# Altium PCB PA_CONTROL_BOARD.PcbDoc
Units mm, origin at the board's own origin, x right, y up, seen from the top; angles counter-clockwise.
Board outline 160 x 110 mm, 4 copper layers (Top Layer, L2(GND), L3(GND), Bottom Layer), stack 1.57 mm thick; 72 components, 82 nets, 322 pads, 4 vias.
Unrouted connection lines stored in the file: 173.
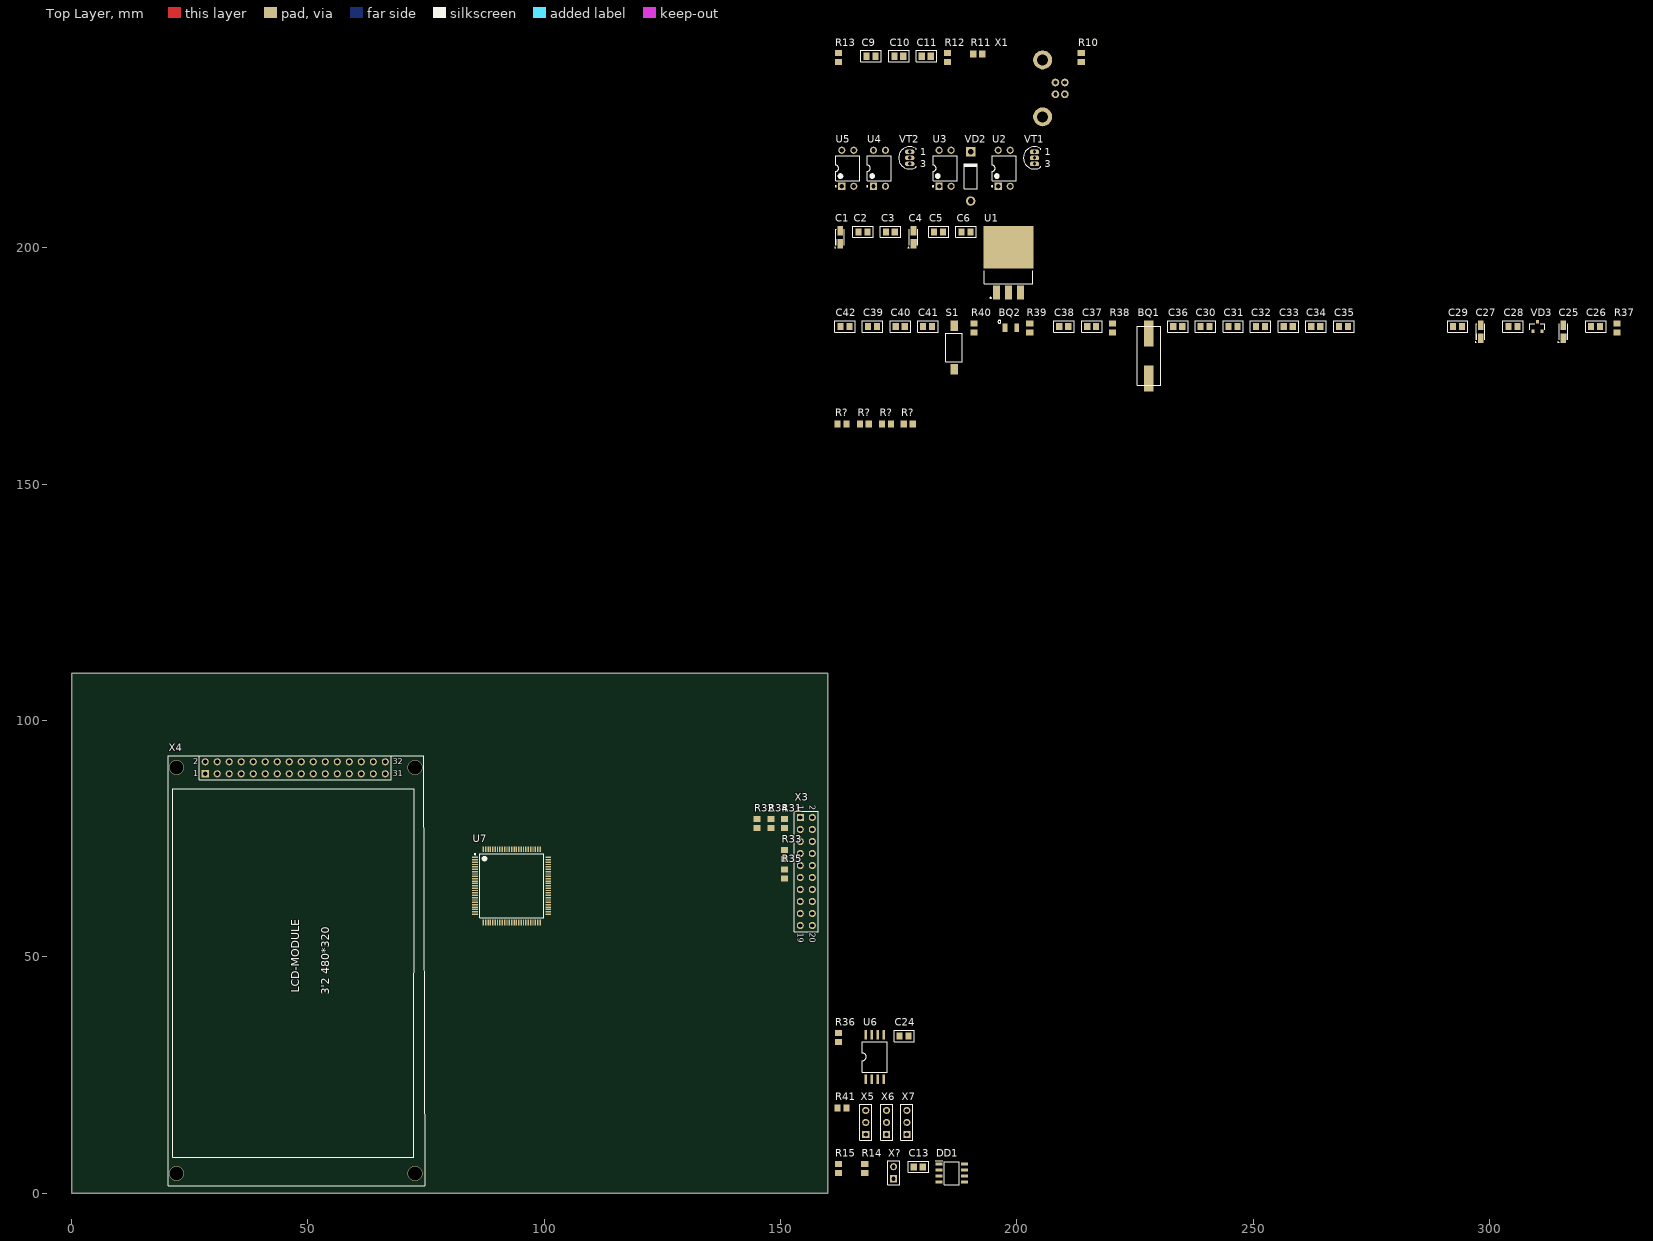
[diagram p0: Top Layer view]
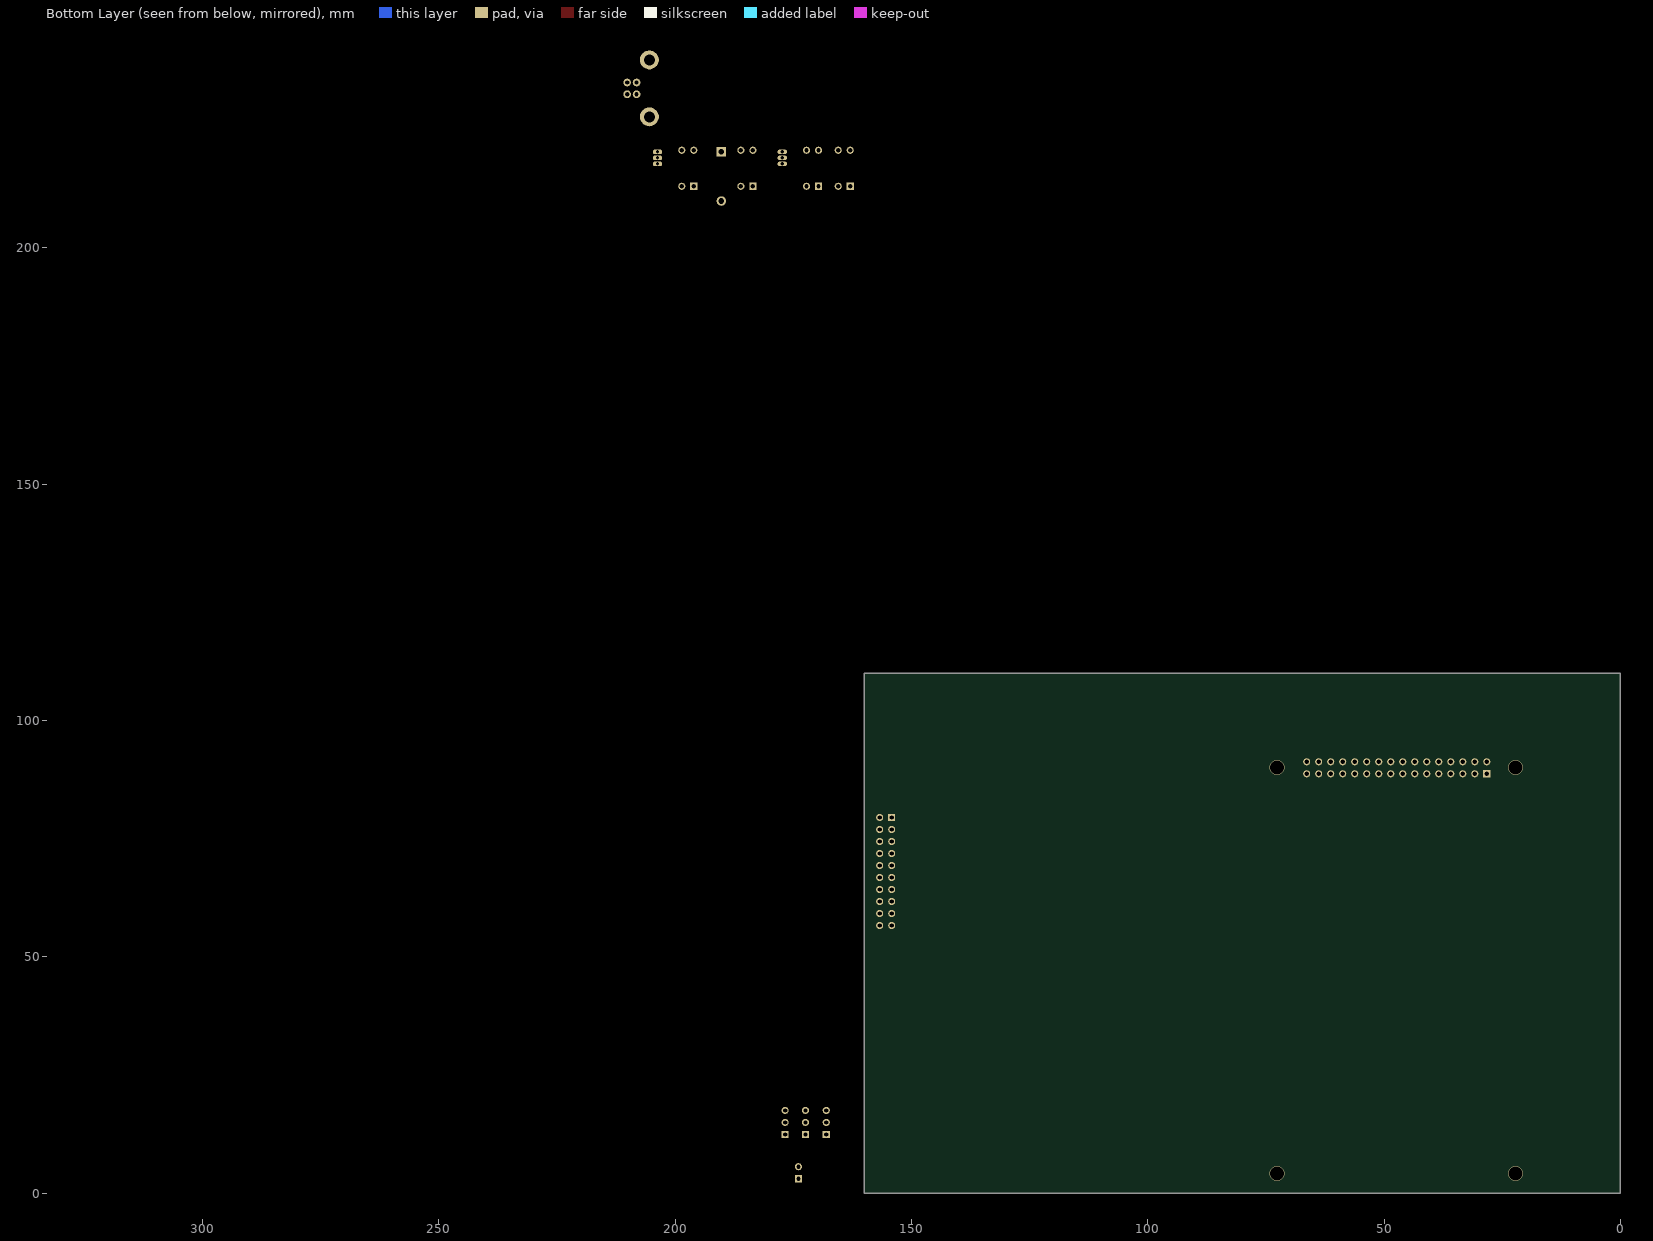
[diagram p1: Bottom Layer view, seen from below]

## Layer stack, top to bottom
Top Solder: solder mask 0.0254, Solder Resist, Dk 3.5
Top Layer: signal copper 0.035
Dielectric 2: prepreg 0.2, PP-017, Dk 4.6
L2(GND): signal copper 0.0175
Dielectric 1: core 1.065, Core-039, Dk 4.6
L3(GND): signal copper 0.0175
Dielectric 3: prepreg 0.2, PP-017, Dk 4.6
Bottom Layer: signal copper 0.035
Bottom Solder: solder mask 0.0254, Solder Resist, Dk 3.5

## Board outline
0,0 160,0 160,110 0,110

## Design rules (kind name [scope] priority, off if disabled: settings)
Clearance [All] p1: gap=0.254 ignorepadtopadclearanceinfootprint=FALSE except(0: Arc-Hole Track-Hole SMDPad-Hole THPad-Hole Via-Hole Fill-Hole Poly-Hole Region-Hole Text-Hole)
PolygonConnect [All] p1: connectstyle=Relief reliefconductorwidth=0.254 reliefentries=4 polygonreliefangle="90 Angle" airgapwidth=0.254
RoomDefinition USB [InComponentClass('USB')] p1: confinementstyle=ConfineIn formatcopy=TRUE lockcomponents=FALSE outline 161.2,225.4 217.2,225.4 217.2,244.6 161.2,244.6
RoomDefinition Seq [InComponentClass('Seq')] p2: confinementstyle=ConfineIn formatcopy=TRUE lockcomponents=FALSE outline 161.2,208.6 207.3,208.6 207.3,224.2 161.2,224.2
RoomDefinition POWER_SUPPLY [InComponentClass('POWER_SUPPLY')] p3: confinementstyle=ConfineIn formatcopy=TRUE lockcomponents=FALSE outline 161.1,188.7 203.8,188.7 203.8,207.4 161.1,207.4
RoomDefinition FLASH [InComponentClass('FLASH')] p4: confinementstyle=ConfineIn formatcopy=TRUE lockcomponents=FALSE outline 161.2,22.8 178.6,22.8 178.6,37.3 161.2,37.3
RoomDefinition DS18B20 [InComponentClass('DS18B20')] p5: confinementstyle=ConfineIn formatcopy=TRUE lockcomponents=FALSE outline 161.1,10.9 178.6,10.9 178.6,21.6 161.1,21.6
RoomDefinition CAN [InComponentClass('CAN')] p6: confinementstyle=ConfineIn formatcopy=TRUE lockcomponents=FALSE outline 161.2,1.5 190,1.5 190,9.6 161.2,9.6
RoutingVias [All] p1: holewidth=0.711 width=1.27 viastyle="Through Hole" minholewidth=0.711 minwidth=1.27 maxholewidth=0.711 maxwidth=1.27
SolderMaskExpansion [All] p1: expansion=0.102 istentingtop=FALSE
Width [All] p1: maxlimit=0.254 minlimit=0.254 preferedwidth=0.254
30 further rules are at their usual default settings.

## Classes and differential pairs
component class DS18B20: R41 X5 X6 X7
component class FLASH: C24 R36 U6
component class LCD_ILI9341: R? X4
component class JTAG: R31 R32 R33 R34 R35 X3
component class USB: C9 C10 C11 R10 R11 R12 R13 X1
component class CAN: C13 DD1 R14 R15 X?
component class Seq: U2 U3 U4 U5 VD2 VT1 VT2
component class POWER_SUPPLY: C1 C2 C3 C4 C5 C6 U1
component class MCU: BQ1 BQ2 C25 C26 C27 C28 C29 C30 C31 C32 C33 C34 C35 C36 C37 C38 C39 C40 C41 C42 R37 R38 R39 R40 S1 U7 VD3

## Components (designator, comment, footprint, x,y, rotation, side; value= is the part's Value field where it differs from the comment)
BQ1 "HC-49SM 8MHz" HC49SM 227.9,177.1 r90 top
BQ2 "FC-135_32.768KHZ-12.5" FC-135 198.7,183.1 r0 top
C1 "TECAP_A" TECAP_A 162.6,202.2 r90 top
C2 "CAP_0805" CAP_0805 167.2,203.3 r0 top
C3 "CAP_0805" CAP_0805 173,203.3 r0 top
C4 "TECAP_A" TECAP_A 178.1,202.2 r90 top
C5 "CAP_0805" CAP_0805 183.2,203.3 r0 top
C6 "CAP_0805" CAP_0805 189,203.3 r0 top
C9 "0.1 uF" CAP_0805 168.9,240.5 r0 top
C10 "18 pF" CAP_0805 174.8,240.5 r0 top
C11 "18 pF" CAP_0805 180.6,240.5 r0 top
C13 "0.1 uF" CAP_0805 178.9,5.5 r0 top
C24 "0.1 uF" CAP_0805 175.9,33.2 r0 top
C25 "1 uF" TECAP_A 315.599,182.2 r90 top
C26 "0.1 uF" CAP_0805 322.199,183.3 r0 top
C27 "1 uF" TECAP_A 298.099,182.2 r90 top
C28 "0.1 uF" CAP_0805 304.699,183.3 r0 top
C29 "0.1 uF" CAP_0805 292.999,183.3 r0 top
C30 "0.1 uF" CAP_0805 239.6,183.3 r0 top
C31 "0.1 uF" CAP_0805 245.5,183.3 r0 top
C32 "0.1 uF" CAP_0805 251.299,183.3 r0 top
C33 "0.1 uF" CAP_0805 257.199,183.3 r0 top
C34 "0.1 uF" CAP_0805 262.999,183.3 r0 top
C35 "0.1 uF" CAP_0805 268.899,183.3 r0 top
C36 "22 pF" CAP_0805 233.8,183.3 r0 top
C37 "22 pF" CAP_0805 215.6,183.3 r0 top
C38 "15 pF" CAP_0805 209.7,183.3 r0 top
C39 "2.2uF" CAP_0805 169.2,183.3 r0 top
C40 "2.2uF" CAP_0805 175.1,183.3 r0 top
C41 "0.1 uF" CAP_0805 180.9,183.3 r0 top
C42 "15 pF" CAP_0805 163.4,183.3 r0 top
DD1 "SN65HVD230" "SOIC8 (SO-8)" 186.2,4.2 r0 top
R10 "4k7" RES_0805 213.6,240.2 r90 top
R11 "10" RES_0805 191.7,241 r0 top
R12 "10" RES_0805 185.3,240.2 r90 top
R13 "51k" RES_0805 162.2,240.2 r90 top
R14 "10k" RES_0805 167.8,5.2 r90 top
R15 "120" RES_0805 162.2,5.2 r90 top
R31 "10K" RES_0805 150.8,78.15 r270 top
R32 "10K" RES_0805 145,78.15 r270 top
R33 "10K" RES_0805 150.8,71.65 r90 top
R34 "10K" RES_0805 148,78.15 r270 top
R35 "10K" RES_0805 150.8,67.5 r270 top
R36 "10K" RES_0805 162.2,32.9 r90 top
R37 "47" RES_0805 326.899,183 r90 top
R38 "1M" RES_0805 220.2,183 r90 top
R39 "10k" RES_0805 202.7,183 r90 top
R40 "100K" RES_0805 190.9,183 r90 top
R41 "4k7" RES_0805 163,18 r0 top
R? "1.5k" RES_0805 163,162.7 r0 top
R? "1.5k" RES_0805 177,162.7 r0 top
R? "1.5k" RES_0805 167.7,162.7 r0 top
R? "1.5k" RES_0805 172.4,162.7 r0 top
S1 "1437566-3 (FSMSM)" 1437566-3 186.7,178.9 r90 top
U1 "LM1085ISX-3.3" LM1085ISX-3.3 198.2,196.8 r90 top
U2 "TLP627" DIP-4 197.3,216.8 r90 top
U3 "TLP781" DIP-4 184.8,216.8 r90 top
U4 "TLP627" DIP-4 170.9,216.8 r90 top
U5 "TLP627" DIP-4 164.2,216.8 r90 top
U6 "W25Q128" W25Q16 169.9,28.8 r90 top
U7 "STM32F407VET6" STM-LQFP100_V 93.1,65 r0 top
VD2 "1N4007" DO-41 190.2,215.1 r90 top
VD3 "BAT54C" BAT54C_SOT23-3 310.099,183.3 r0 top
VT1 "2N3906" TO-92 203.7,219 r0 top
VT2 "2SC1815" TO-92 177.3,219 r0 top
X1 "USB_TYPE_B" USB_TypeB_Tyco 205.3,233.7 r0 top
X3 "JTAG" HDR2X10 154.16,79.46 r270 top
X4 "LCD-MODULE" LCD-MODULE-3.2-480-320 20.44,2.54 r90 top
X5 "DS18B20" HDR1X3 168,12.4 r90 top
X6 "DS18B20" HDR1X3 172.4,12.4 r90 top
X7 "DS18B20" HDR1X3 176.7,12.4 r90 top
X? "DS1021_1x2" PLD2 173.9,4.3 r90 top

## Footprints (in the part's own frame and the unit in brackets; to place one, negate y for a bottom-side part, rotate by r counter-clockwise, add the part's x,y. Pads: shape width x height; smd on the part's side, far side on the other; paste and mask are expansions set on the pad)
1437566-3 [mm]
  rect 2.18x1.6 smd: 1(-4.6,0) 2(4.6,0)
  silkscreen extent -3,-1.75 3,1.75, body extent -5.54,-1.75 5.54,1.75, height 4.87
BAT54C_SOT23-3 [mm]
  rect 0.6x0.7 smd: 1(-0.95,-1) 2(0.95,-1) 3(0,1)
  silkscreen extent -1.57,-0.65 1.57,0.66, body extent -1.45,-1.17 1.45,1.13, height 1.1
CAP_0805 [mm]
  rect 1.3x1.5 smd: 1(-0.75,0) 2(1.15,0)
  silkscreen extent -1.91,-1.14 2.41,1.27
DIP-4 [mm] "DIP; 4 Leads; Row Spacing 7.62 mm; Pitch 2.54 mm"
  rect 1.5x1.5 hole 0.9: 1(-3.81,1.27)
  round 1.5 hole 0.9: 2(-3.81,-1.27) 3(3.81,-1.27) 4(3.81,1.27)
  silkscreen extent -3.93,-2.55 2.65,2.69, body extent -3.15,-2.5 3.15,2.5, height 5.6
DO-41 [mm] "Diode, Axial; Body 5.2 x 2.7 mm (LxDia. max), Lead Dia. 0.86 mm (max)"
  round 2 hole 1.2: 1(-5.23,0)
  rect 2x2 hole 1.2: 2(5.23,0)
  silkscreen extent -2.65,-1.4 2.75,1.4
FC-135 [mm]
  rect 1x1.8 smd: 1(-1.25,0) 2(1.25,0)
  silkscreen extent -2.72,0.9 -2.09,1.54, body extent -1.6,-0.75 1.6,0.75, height 0.8
HC49SM [mm]
  rect 5.5x2 smd: 1(-4.75,0) 2(4.75,0)
  silkscreen extent -6.25,-2.5 6.25,2.5, body extent -6.2,-2.35 6.2,2.35, height 3.8
HDR1X3 [mm] "Connector; Header; 3 Position"
  rect 1.5x1.5 hole 0.9: 1(0,0)
  round 1.5 hole 0.9: 2(2.54,0) 3(5.08,0)
  silkscreen extent -1.27,-1.27 6.35,1.27
HDR2X10 [mm] "Connector; Header; 10x2 Position"
  rect 1.5x1.5 hole 0.9: 1(0,0)
  round 1.5 hole 0.9: 2(0,2.54) 3(2.54,0) 4(2.54,2.54) 5(5.08,0) 6(5.08,2.54) 7(7.62,0) 8(7.62,2.54) 9(10.16,0) 10(10.16,2.54) 11(12.7,0) 12(12.7,2.54) 13(15.24,0) 14(15.24,2.54) 15(17.78,0) 16(17.78,2.54) 17(20.32,0) 18(20.32,2.54) 19(22.86,0) 20(22.86,2.54)
  silkscreen extent -1.27,-1.27 24.13,3.81
LCD-MODULE-3.2-480-320 [mm]
  rect 1.5x1.5 hole 0.9: 1(86.16,-7.82)
  round 1.5 hole 0.9: 2(88.7,-7.82) 3(86.16,-10.36) 4(88.7,-10.36) 5(86.16,-12.9) 6(88.7,-12.9) 7(86.16,-15.44) 8(88.7,-15.44) 9(86.16,-17.98) 10(88.7,-17.98) 11(86.16,-20.52) 12(88.7,-20.52) 13(86.16,-23.06) 14(88.7,-23.06) 15(86.16,-25.6) 16(88.7,-25.6) 17(86.16,-28.14) 18(88.7,-28.14) 19(86.16,-30.68) 20(88.7,-30.68) 21(86.16,-33.22) 22(88.7,-33.22) 23(86.16,-35.76) 24(88.7,-35.76) 25(86.16,-38.3) 26(88.7,-38.3) 27(86.16,-40.84) 28(88.7,-40.84) 29(86.16,-43.38) 30(88.7,-43.38) 31(86.16,-45.92) 32(88.7,-45.92)
  silkscreen extent -1,-54.3 90,0
LM1085ISX-3.3 [mm]
  rect 3x1.45 smd: 1(-6.3,2.54) 2(-6.3,0) 3(-6.3,-2.54)
  rect 9x10.6 smd: 4(3.3,0)
  silkscreen extent -7.61,-5.1 -1.7,5.1
PLD2 [mm]
  rect 1.5x1.5 hole 0.9: 1(-1.27,0)
  round 1.5 hole 0.9: 2(1.27,0)
  silkscreen extent -2.54,-1.27 2.54,1.27, body extent -2.5,-1.26 2.5,1.28, height 8.5
RES_0805 [mm]
  rect 1.3x1.5 smd: 1(-0.95,0) 2(0.95,0)
"SOIC8 (SO-8)" [mm]
  rect 1.525x0.65 smd: 1(-2.712,1.905) 2(-2.712,0.635) 3(-2.712,-0.635) 4(-2.712,-1.905) 5(2.712,-1.905) 6(2.712,-0.635) 7(2.712,0.635) 8(2.712,1.905)
  silkscreen extent -3.47,-2.45 1.6,2.58, body extent -3.08,-2.5 3.08,2.5, height 2
STM-LQFP100_V [mm] "Thin QFP, 100-Leads, Body 14x14mm, Pitch 0.5mm, ST Recommended"
  rect 1.2x0.3 smd: 1(-7.75,6) 2(-7.75,5.5) 3(-7.75,5) 4(-7.75,4.5) 5(-7.75,4) 6(-7.75,3.5) 7(-7.75,3) 8(-7.75,2.5) 9(-7.75,2) 10(-7.75,1.5) 11(-7.75,1) 12(-7.75,0.5) 13(-7.75,0) 14(-7.75,-0.5) 15(-7.75,-1) 16(-7.75,-1.5) 17(-7.75,-2) 18(-7.75,-2.5) 19(-7.75,-3) 20(-7.75,-3.5) 21(-7.75,-4) 22(-7.75,-4.5) 23(-7.75,-5) 24(-7.75,-5.5) 25(-7.75,-6) 51(7.75,-6) 52(7.75,-5.5) 53(7.75,-5) 54(7.75,-4.5) 55(7.75,-4) 56(7.75,-3.5) 57(7.75,-3) 58(7.75,-2.5) 59(7.75,-2) 60(7.75,-1.5) 61(7.75,-1) 62(7.75,-0.5) 63(7.75,0) 64(7.75,0.5) 65(7.75,1) 66(7.75,1.5) 67(7.75,2) 68(7.75,2.5) 69(7.75,3) 70(7.75,3.5) 71(7.75,4) 72(7.75,4.5) 73(7.75,5) 74(7.75,5.5) 75(7.75,6)
  rect 0.3x1.2 smd: 26(-6,-7.75) 27(-5.5,-7.75) 28(-5,-7.75) 29(-4.5,-7.75) 30(-4,-7.75) 31(-3.5,-7.75) 32(-3,-7.75) 33(-2.5,-7.75) 34(-2,-7.75) 35(-1.5,-7.75) 36(-1,-7.75) 37(-0.5,-7.75) 38(0,-7.75) 39(0.5,-7.75) 40(1,-7.75) 41(1.5,-7.75) 42(2,-7.75) 43(2.5,-7.75) 44(3,-7.75) 45(3.5,-7.75) 46(4,-7.75) 47(4.5,-7.75) 48(5,-7.75) 49(5.5,-7.75) 50(6,-7.75) 76(6,7.75) 77(5.5,7.75) 78(5,7.75) 79(4.5,7.75) 80(4,7.75) 81(3.5,7.75) 82(3,7.75) 83(2.5,7.75) 84(2,7.75) 85(1.5,7.75) 86(1,7.75) 87(0.5,7.75) 88(0,7.75) 89(-0.5,7.75) 90(-1,7.75) 91(-1.5,7.75) 92(-2,7.75) 93(-2.5,7.75) 94(-3,7.75) 95(-3.5,7.75) 96(-4,7.75) 97(-4.5,7.75) 98(-5,7.75) 99(-5.5,7.75) 100(-6,7.75)
  silkscreen extent -7.87,-6.75 6.75,6.82, body extent -7,-7 7,7, height 1.6
TECAP_A [mm]
  rect 2x1.2 smd: 1(-1.4,0) 2(1.4,0)
  silkscreen extent -2.35,-0.9 1.7,1.17, body extent -1.7,-0.9 1.7,0.9, height 1.7
TO-92 [mm] "TO, Flat Index; 3 In-Line, Axial Leads; Body Dia. 4.6mm; Leads 0.41 x 0.39 mm (max)"
  oval 2x1 hole 0.7: 1(0,1.27) 2(0,0) 3(0,-1.27)
  silkscreen extent -2.34,-2.34 1.35,2.34
USB_TypeB_Tyco [mm]
  round 1.626 hole 0.914: 1(4.83,-1.25) 2(4.83,1.25) 3(2.83,1.25) 4(2.83,-1.25)
  round 4 hole 2.3: MH(0.12,-6.02) MH(0.12,6.02)
  body extent -10.16,-7.47 6.14,7.43, height 11.6
W25Q16 [mm]
  rect 2x0.6 smd: 1(-4.7,1.905) 2(-4.7,0.635) 3(-4.7,-0.635) 4(-4.7,-1.905) 5(4.7,-1.905) 6(4.7,-0.635) 7(4.7,0.635) 8(4.7,1.905)
  silkscreen extent -3.2,-2.6 3.2,2.6

## Part data
BQ1: library part HC49SM, "HC49SM"
BQ2: library part FC135-32768-7, "Clock SMD Crystal"
C1 C4: "Tantalum pol cap type A"
C9 C10 C11 C13 C24 C26 C28 C29 C30 C31 C32 C33 C34 C35 C36 C37 C38 C39 C40 C41 C42: library part CAP_0805, "CAP_0805"
C25 C27: library part TECAP_A, "Tantalum pol cap type A"
DD1: library part SN65HVD23x
R10 R11 R12 R13 R14 R15 R31 R32 R33 R34 R35 R36 R37 R38 R39 R40 R41 R? R? R? R?: library part RES_0805, "RES_0805"
S1: library part 1437566-3, "FSMSM=3.5X6 SMT TACT", Contact_Current_Rating="50 mA", Package=None, Availability=Unavailable, Configuration_Pole-Throw="Single Pole - Single Throw", MF="TE Connectivity", MP=1437566-3, Price=None, SnapEDA_Link=https://www.snapeda.com/parts/1437566-3/TE%20Connectivity/view-part/?ref=snap
U2 U3 U4 U5: library part Optopair
U7: "ARM Cortex-M4 32-bit MCU+FPU, 210 DMIPS, 512 kB Flash, 192 kB Internal RAM, 82 I/Os, 100-pin LQFP, -40 to 85 degC, Tray", I/Os (High Current)=82, Manufacturer=STMicroelectronics, Operating Frequency(F) (Processor speed) (MHz)=168, Supplier Part Number 1=497-12075-ND, Supply Voltage(Vcc) max (V)=3.6, Supply Voltage(Vcc) min (V)=1.8, ComponentLink1Description="Manufacturer URL", ComponentLink1URL=http://www.st.com/web/en/home.html, ComponentLink2Description=Datasheet, ComponentLink2URL=http://www.st.com/st-web-ui/static/active/en/resource/technical/document/datasheet/DM00037051.pdf, ComponentLink3Description="Package Specification", ComponentLink3URL=http://www.st.com/st-web-ui/static/active/en/resource/technical/document/data_brief/DM00071938.pdf, Core="ARM Cortex-M4", D/A Converter=2x12-bit, DatasheetVersion="Rev. 4", FLASH Size (Prog) (kB)=512, Internal RAM Size (kB)=192, Mounting Technology="Surface Mount", PackageDescription="100-Pin Low Profile Quad Flat Package, 14 x 14 mm Body, 0.5 mm Pitch", PackageReference=LQFP100, PackageVersion="Rev. 1, 06/2013", Packing=Tray, PartNumber=STM32F407VET6, Supplier 1=Digi-Key, Supplier 2=Farnell, Supplier 3=Newark, Supplier 4=Mouser, Supplier Part Number 2=2064367, Supplier Part Number 3=73T2332, Supplier Part Number 4=511-STM32F407VET6
VD3: "Small Signal Schottky Diode, Dual Common Cathode, 30 V, 200 mA, 400 mV, 600 mA, 125 C"
VT1: library part TRANS-PNP
VT2: library part TRANS-NPN
X4: "LCD-MODULE_3'2"
X?: "Вилка штыревая 2.54мм 1x2 прямая тип1"

## Via types
v1: diameter 3.2, hole 3, Top Layer to Bottom Layer, 4 vias

## Nets (pads, with @x,y where several pads share a name; then routed paths per layer and width w, separated by ;. In a path a pad name is that pad's centre, name@x,y a point inside that pad or via, vN(x,y) a via of type N, cw(c..) or ccw(c..) an arc to the next point about the centre after c; other vN are vias at no path point)
3.3V: R31.1 R34.1 X3.1 X3.2
3V3: C30.1 C31.1 C32.1 C33.1 C34.1 C35.1 R40.1 U7.11 U7.19 U7.28 U7.50 U7.75 U7.100 VD3.2
+3.3: C24.1 R36.1 R41.1 U6.3 U6.7 U6.8 X4.31 X5.1 X6.1 X7.1
+12V: C1.1 C2.1 U1.3
EGND: 
GND: C1.2 C2.2 C3.2 C4.2 C5.2 C6.2 C9.2 C10.2 C11.2 C24.2 C25.2 C26.2 C27.1 C28.1 C29.2 C30.2 C31.2 C32.2 C33.2 C34.2 C35.2 C36.2 C37.2 C38.2 C39.2 C40.2 C41.2 C42.2 DD1.2 R13.2 R14.2 R35.2 R39.1 R?.2@163.95,162.7 S1.2 U1.1 U2.2 U2.3 U3.3 U4.2 U4.3 U5.2 U5.3 U6.4 U7.10 U7.20 U7.27 U7.74 U7.99 X1.4 X3.4 X3.6 X3.8 X3.10 X3.12 X3.14 X3.16 X3.18 X3.20 X4.1 X4.30 X4.32 X5.3 X6.3 X7.3
NetBQ1_1: BQ1.1 R38.2 U7.13
NetBQ1_2: BQ1.2 C36.1 R38.1 U7.12
NetBQ2_1: BQ2.1 C42.1 U7.9
NetBQ2_2: BQ2.2 C38.1 U7.8
NetC3_1: C3.1 C4.1 C5.1 C6.1 U1.2 U1.4
NetC8_1: 
NetC9_1: C9.1 R10.2 R13.1 X1.1
NetC10_1: C10.1 R11.1 X1.2
NetC11_1: C11.1 R12.1 X1.3
NetC13_2: C13.2 DD1.3
NetC25_1: C25.1 C26.1 R37.1 U7.21
NetC27_2: C27.2 C28.2 R37.2 U7.22
NetC29_1: C29.1 U7.6 VD3.3
NetC39_1: C39.1 U7.73
NetC40_1: C40.1 U7.49
NetC41_1: C41.1 R40.2 S1.1 U7.14
NetDD1_1: DD1.1
NetDD1_4: DD1.4
NetDD1_6: DD1.6 R15.2
NetDD1_7: DD1.7 X?.1
NetDD1_8: DD1.8 R14.1
NetJ1_1: VD3.1
NetK1_A2: U4.4
NetR1_1: 
NetR2_1: U3.4
NetR2_2: U2.1
NetR3_1: U2.4
NetR4_1: U3.1
NetR5_1: 
NetR6_2: U4.1
NetR7_2: U3.2
NetR8_2: U5.1
NetR9_1: U5.4
NetR10_1: R10.1 U7.68
NetR11_2: R11.2 U7.70
NetR12_2: R12.2 U7.71
NetR15_1: R15.1 X?.2
NetR31_2: R31.2 X3.3
NetR32_2: R32.2 U7.77 X3.5
NetR33_2: R33.2 U7.72 X3.7
NetR34_2: R34.2 X3.13
NetR35_1: R35.1 U7.76 X3.9
NetR36_2: R36.2 U6.1 U7.35
NetR41_2: R41.2 X5.2 X6.2 X7.2
NetR?_1: R?.1@171.45,162.7 R?.2@177.95,162.7
NetR?_2: R?.2@168.65,162.7 U7.34
NetU6_2: U6.2 U7.31
NetU6_5: U6.5 U7.91
NetU6_6: U6.6 U7.30
NetU7_38: U7.38 X4.14
NetU7_39: U7.39
NetU7_40: U7.40
NetU7_41: U7.41 X4.11
NetU7_42: U7.42
NetU7_43: U7.43 X4.9
NetU7_44: U7.44 X4.8
NetU7_45: U7.45 X4.7
NetU7_46: U7.46 X4.6
NetU7_51: U7.51 X4.24
NetU7_52: U7.52 X4.23
NetU7_53: U7.53 X4.26
NetU7_54: U7.54 X4.25
NetU7_55: U7.55 X4.5
NetU7_56: U7.56 X4.4
NetU7_57: U7.57 X4.3
NetU7_60: U7.60 X4.2 X4.21
NetU7_61: U7.61 X4.18
NetU7_62: U7.62 X4.17
NetU7_81: U7.81 X4.16
NetU7_82: U7.82 X4.15
NetU7_85: U7.85 X4.19
NetU7_86: U7.86 X4.20
NetU7_88: U7.88 X4.22
NetVD2_C: 
NetX3_15: X3.15
VCC: 
pads on no net: C13.1 C37.1 DD1.5 R32.1 R33.1 R39.2 R?.1@162.05,162.7 R?.1@166.75,162.7 R?.1@176.05,162.7 R?.2@173.35,162.7 U7.1 U7.2 U7.3 U7.4 U7.5 U7.7 U7.15 U7.16 U7.17 U7.18 U7.23 U7.24 U7.25 U7.26 U7.29 U7.32 U7.33 U7.36 U7.37 U7.47 U7.48 U7.58 U7.59 U7.63 U7.64 U7.65 U7.66 U7.67 U7.69 U7.78 U7.79 U7.80 U7.83 U7.84 U7.87 U7.89 U7.90 U7.92 U7.93 U7.94 U7.95 U7.96 U7.97 U7.98 VD2.1 VD2.2 VT1.1 VT1.2 VT1.3 VT2.1 VT2.2 VT2.3 X1.MH X3.11 X3.17 X3.19 X4.10 X4.12 X4.13 X4.27 X4.28 X4.29
copper on no net:
  other v1: 22.218,4.14 72.637,4.14 22.218,90.04 72.637,90.04

## Text inside footprints (layer, text, board x,y; h text height)
VT1: Top Overlay "3" at 205.924,216.965 h1.5; Top Overlay "1" at 205.924,219.56 h1.5
VT2: Top Overlay "3" at 179.524,216.965 h1.5; Top Overlay "1" at 179.524,219.56 h1.5
X3: Top Overlay "2" at 156.192,82 h1.27 r270; Top Overlay "1" at 153.652,82 h1.27 r270; Top Overlay "19" at 153.652,55.076 h1.27 r270; Top Overlay "20" at 156.192,55.076 h1.27 r270
X4: Top Overlay "1" at 25.72,88.192 h1.27; Top Overlay "31" at 67.884,88.192 h1.27; Top Overlay "32" at 67.884,90.732 h1.27; Top Overlay "2" at 25.72,90.732 h1.27; Top Overlay "3'2 480*320" at 54.476,41.91 h1.67 r90